# Altium PCB FanHumidityController.PcbDoc
Units mm, origin at the board's own origin, x right, y up, seen from the top; angles counter-clockwise.
Board outline 152.4 x 101.6 mm, 2 copper layers (Top Layer, Bottom Layer); 50 components, 34 nets, 157 pads, 0 vias.
Unrouted connection lines stored in the file: 90.
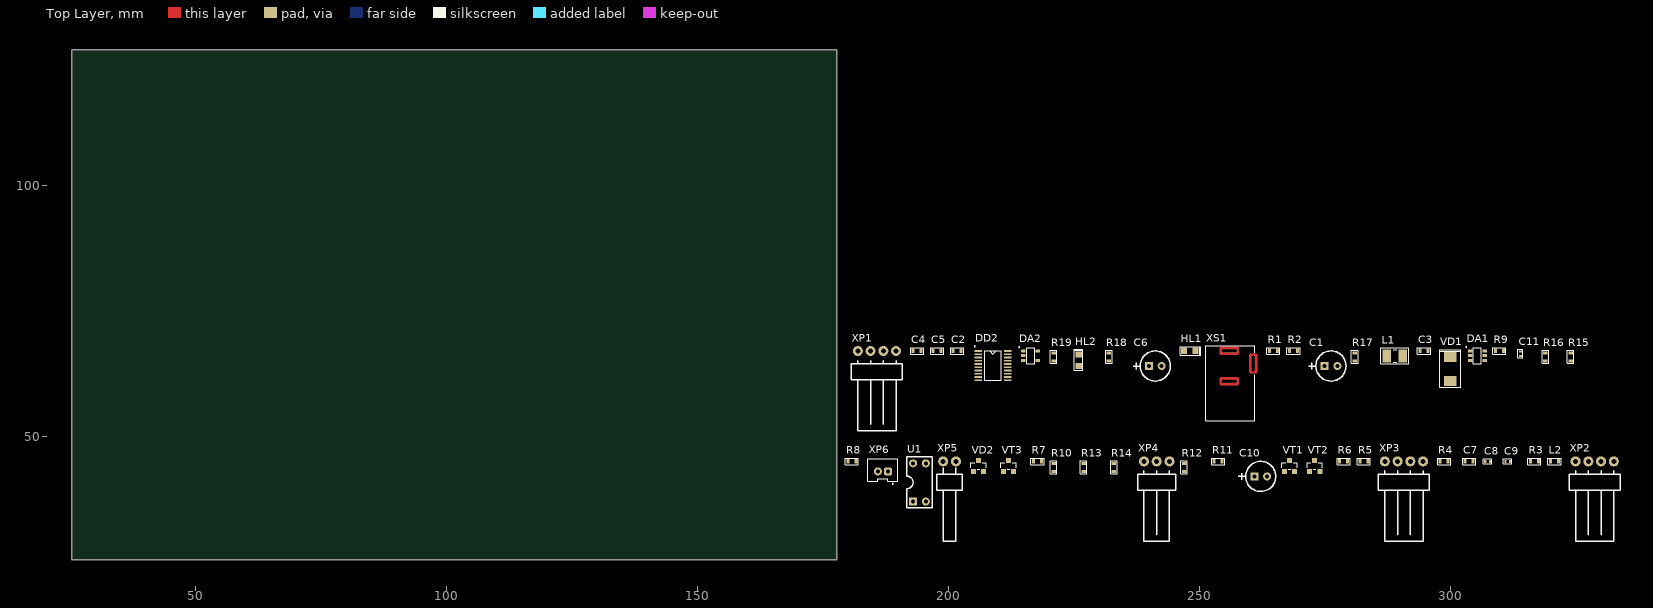
[diagram p0: Top Layer view]
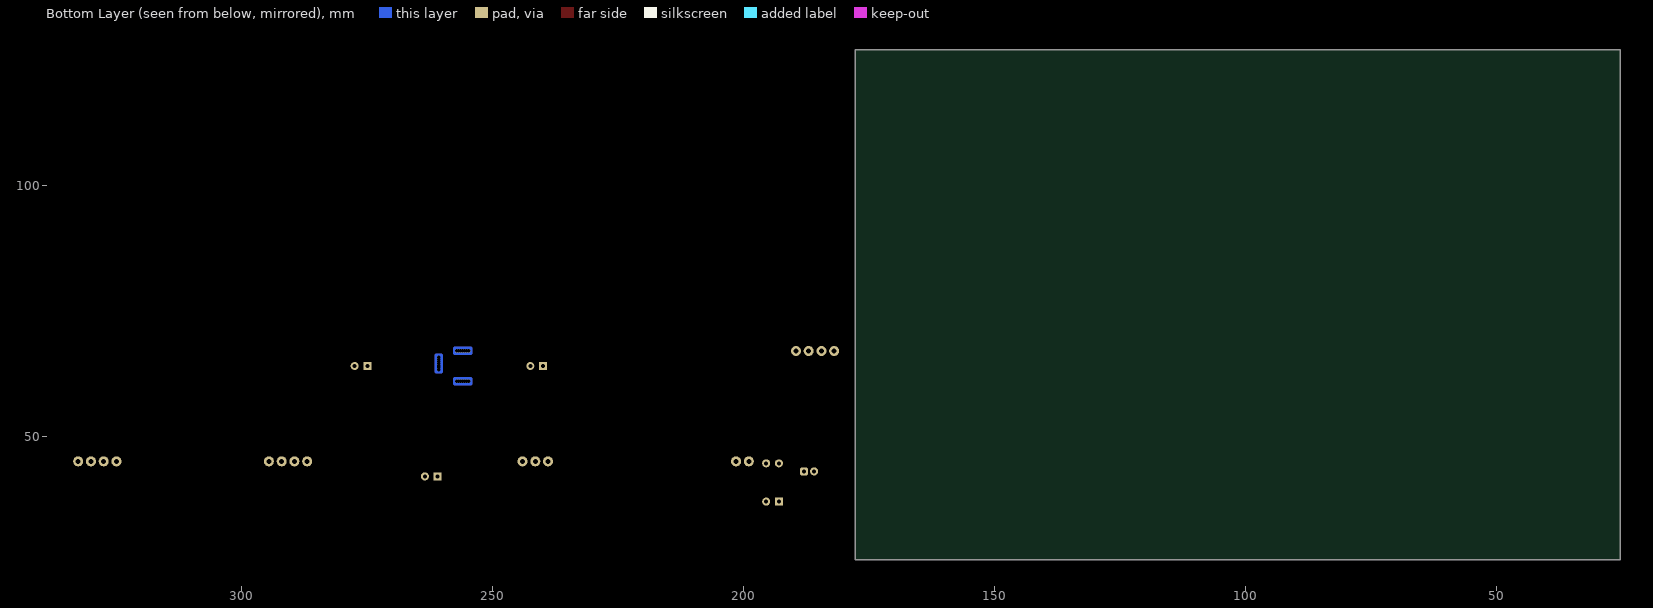
[diagram p1: Bottom Layer view, seen from below]

## Layer stack, top to bottom
Top Solder: solder mask 0.0102, Solder Resist, Dk 3.5
Top Layer: signal copper 0.0356
Dielectric 1: dielectric 0.32, FR-4, Dk 4.8
Bottom Layer: signal copper 0.0356
Bottom Solder: solder mask 0.0102, Solder Resist, Dk 3.5

## Board outline
25.4,25.4 177.8,25.4 177.8,127 25.4,127

## Design rules (kind name [scope] priority, off if disabled: settings)
Clearance [All] p1: gap=0.254 ignorepadtopadclearanceinfootprint=FALSE except(0: Arc-Hole Track-Hole SMDPad-Hole THPad-Hole Via-Hole Fill-Hole Poly-Hole Region-Hole Text-Hole)
PolygonConnect [All] p1: connectstyle=Relief reliefconductorwidth=0.254 reliefentries=4 polygonreliefangle="90 Angle" airgapwidth=0.254
RoutingVias [All] p1: holewidth=0.711 width=1.27 viastyle="Through Hole" minholewidth=0.711 minwidth=1.27 maxholewidth=0.711 maxwidth=1.27
SolderMaskExpansion [All] p1: expansion=0.102 istentingtop=FALSE
Width [All] p1: maxlimit=0.254 minlimit=0.254 preferedwidth=0.254
30 further rules are at their usual default settings.

## Components (designator, comment, footprint, x,y, rotation, side; value= is the part's Value field where it differs from the comment)
C1 "22uF 16V" CAP100RP 275,64 r0 top
C2 "2µ2x10V X7R" 0603_CAP 201,67 r0 top
C3 "10nF 50V X7R" 0603_CAP 294,67 r0 top
C4 "10nF 50V X7R" 0603_CAP 193,67 r0 top
C5 "2µ2x10V X7R" 0603_CAP 197,67 r0 top
C6 "22uF 16V" CAP100RP 240,64 r0 top
C7 "2µ2x10V X7R" 0603_CAP 303,45 r0 top
C8 "µ10x10V X7R" 0402_CAP 307,45 r0 top
C9 "µ10x10V X7R" 0402_CAP 311,45 r0 top
C10 "22uF 16V" CAP100RP 261,42 r0 top
C11 "µ10x10V X7R" 0402_CAP 314,66 r90 top
DA1 "MP2259DT(J)" SOT23-6 304,67 r0 top
DA2 "TPS79333DBVR" SOT23-5 215,67 r0 top
DD2 "STM32F030F4P6" TSSOP20 206,67 r0 top
HL1 "KP-2012SYC" KP-2012_YEL 247,67 r0 top
HL2 "KP-2012SYC" KP-2012_YEL 226,64 r90 top
L1 "NLCV32T" 1210L 289,66 r0 top value="10 µH"
L2 "470R BLM18PG471SN1D" 0603_BLM18 320,45 r0 top
R1 "10k 1%" 0603_RES 264,67 r0 top
R2 "51k 1%" 0603_RES 268,67 r0 top
R3 "10k 1%" 0603_RES 316,45 r0 top
R4 "3k3 1%" 0603_RES 298,45 r0 top
R5 "3k3 1%" 0603_RES 282,45 r0 top
R6 "3k3 1%" 0603_RES 278,45 r0 top
R7 "3k3 1%" 0603_RES 217,45 r0 top
R8 "240R 1%" 0603_RES 180,45 r0 top
R9 "10k 1%" 0603_RES 309,67 r0 top
R10 "3k3 1%" 0603_RES 221,43 r90 top
R11 "10k 1%" 0603_RES 253,45 r0 top
R12 "3k3 1%" 0603_RES 247,43 r90 top
R13 "3k3 1%" 0603_RES 227,43 r90 top
R14 "3k3 1%" 0603_RES 233,43 r90 top
R15 "3k3 1%" 0603_RES 324,65 r90 top
R16 "3k3 1%" 0603_RES 319,65 r90 top
R17 "10k 1%" 0603_RES 281,65 r90 top
R18 "1k2 1%" 0603_RES 232,65 r90 top
R19 "1k2 1%" 0603_RES 221,65 r90 top
U1 "PC817" DIP4 193,37 r90 top
VD1 "SM6T18A" SMB-STPS3L60U 300,61 r90 top
VD2 "BAT54" SOT-23-(2) 205,43 r0 top
VT1 "BSS138" "SOT-23 MOSFET" 267,43 r0 top
VT2 "IRLML2244TRPBF" "SOT-23 MOSFET" 272,43 r0 top
VT3 "BSS138" "SOT-23 MOSFET" 211,43 r0 top
XP1 "WF-4R" WF-4R 182,67 r0 top
XP2 "WF-4R" WF-4R 325,45 r0 top
XP3 "WF-4R" WF-4R 287,45 r0 top
XP4 "WF-3R" WF-3R 239,45 r0 top
XP5 "WF-2R" WF-2R 199,45 r0 top
XP6 "PH-2" PH-2 188,43 r0 top
XS1 "DS-210B(PBT)(NB)" DS-210B(PBT)(NB) 256,67 r90 top

## Footprints (in the part's own frame and the unit in brackets; to place one, negate y for a bottom-side part, rotate by r counter-clockwise, add the part's x,y. Pads: shape width x height; smd on the part's side, far side on the other; paste and mask are expansions set on the pad)
0402_CAP [mm] "Конденсатор 0402(1005)"
  rect 0.4x0.6 smd mask+0.025: 1(0,0) 2(0.9,0)
  silkscreen extent -0.4,-0.5 1.3,0.5, body extent -0.05,-0.25 0.95,0.25, height 0.5
0603_BLM18 [mm] "Ферритовый фильтр 0603(1608)"
  rect 0.6x0.9 smd mask+0.025: 1(0,0) 2(1.6,0)
  silkscreen extent -0.5,-0.65 2.1,0.65, body extent 0,-0.4 1.6,0.4, height 0.8
0603_CAP [mm] "Конденсатор 0603(1608)"
  rect 0.6x0.9 smd mask+0.025: 1(0,0) 2(1.6,0)
  silkscreen extent -0.5,-0.65 2.1,0.65, body extent -0.05,-0.45 1.65,0.45, height 0.95
0603_RES [mm] "Резистор 0603(1608)"
  rect 0.6x0.9 smd mask+0.025: 1(0,0) 2(1.6,0)
  silkscreen extent -0.5,-0.65 2.1,0.65, body extent -0.05,-0.4 1.65,0.4, height 0.56
1210L [mm] "Inductor, 2-Leads, Body 3,20x2,50mm, IPC Low Density"
  rect 1.7x2.65 smd: 1(-1.6,0) 2(1.6,0)
  silkscreen extent -2.8,-1.6 2.8,1.6, body extent -1.6,-1.25 1.6,1.25, height 2.3
CAP100RP [mm]
  round 1.6 hole 0.8: MINUS(2.54,0)
  rect 1.6x1.6 hole 0.8: PLUS(0,0)
  silkscreen extent -3.17,-3 4.27,3
DIP4 [mm]
  rect 1.6x1.6 hole 0.8: 1(0,0)
  round 1.6 hole 0.8: 2(0,-2.54) 3(7.62,-2.54) 4(7.62,0)
  silkscreen extent -1.27,-3.81 8.89,1.27
DS-210B(PBT)(NB) [mm] "DS-210, Гнездо питания 2,1х5,5мм на панель"
  round 0.7 hole 0.7: 1(0,1.2) 1(0,0.8) 1(0,0.4) 1(0,0) 1(0,-0.4) 1(0,-0.8) 1(0,-1.2)
  round 0.6 hole 0.7: 2(-6,-1.2) 2(-6,-0.8) 2(-6,-0.4) 2(-6,0) 2(-6,0.4) 2(-6,0.8) 2(-6,1.2) 3(-3.7,-4.8) 3(-3.3,-4.8) 3(-2.9,-4.8) 3(-2.5,-4.8) 3(-2.1,-4.8) 3(-1.7,-4.8) 3(-1.3,-4.8)
  Top Layer region: -4.2,-4 -4.4,-4.2 -4.4,-5.4 -4.2,-5.6 -0.8,-5.6 -0.6,-5.4 -0.6,-4.2 -0.8,-4
  Top Layer region: -6.8,-1.7 -6.6,-1.9 -5.4,-1.9 -5.2,-1.7 -5.2,1.7 -5.4,1.9 -6.6,1.9 -6.8,1.7
  Top Layer region: -0.8,-1.7 -0.6,-1.9 0.6,-1.9 0.8,-1.7 0.8,1.7 0.6,1.9 -0.6,1.9 -0.8,1.7
  Bottom Layer region: -4.2,-4 -4.4,-4.2 -4.4,-5.4 -4.2,-5.6 -0.8,-5.6 -0.6,-5.4 -0.6,-4.2 -0.8,-4
  Bottom Layer region: -6.8,-1.7 -6.6,-1.9 -5.4,-1.9 -5.2,-1.7 -5.2,1.7 -5.4,1.9 -6.6,1.9 -6.8,1.7
  Bottom Layer region: -0.8,-1.7 -0.6,-1.9 0.6,-1.9 0.8,-1.7 0.8,1.7 0.6,1.9 -0.6,1.9 -0.8,1.7
  silkscreen extent -13.9,-5.1 1,4.7, body extent -13.8,-4.97 0.7,4.57, height 11
KP-2012_YEL [mm] "Светодиод 0805 Жёлтый"
  rect 1.2x1.3 smd mask+0.025: 1(0,0) 2(2.275,0)
  silkscreen extent -0.8,-0.85 3.3,0.85, body extent 0.15,-0.62 2.15,0.62, height 1.1
PH-2 [mm]
  rrect50% 1.6x1.6 hole 0.8 mask+0.025: 1(0,0)
  round 1.6 hole 0.8 mask+0.025: 2(-2,0)
  silkscreen extent -4,-2.6 2,2.5, body extent -3.95,-1.7 1.95,2.8, height 6
SMB-STPS3L60U [mm]
  rect 2x2.5 smd mask+0.025: 1(0,0) 2(4.763,0)
  silkscreen extent -1.2,-2.1 6.25,2.1, body extent -0.39,-1.97 5.19,1.97, height 2.6
SOT23-5 [mm]
  rrect50% 0.9x0.6 smd mask+0.025: 1(0,0)
  rect 0.9x0.6 smd mask+0.025: 2(0,-0.953) 3(0,-1.905) 4(2.857,-1.905) 5(2.857,0)
  silkscreen extent -0.95,-2.54 2.22,0.87, body extent 0,-2.4 2.8,0.5, height 1.09
SOT23-6 [mm]
  rrect50% 0.9x0.6 smd mask+0.025: 1(0,0)
  rect 0.9x0.6 smd mask+0.025: 2(0,-0.953) 3(0,-1.905) 4(2.857,-1.905) 5(2.857,-0.953) 6(2.857,0)
  silkscreen extent -0.87,-2.54 2.22,0.87, body extent 0.02,-2.45 2.83,0.55, height 0.86
"SOT-23 MOSFET" [mm]
  rect 1x1 smd mask+0.025: D(1.016,2.21) G(0,0) S(2.032,0)
  silkscreen extent -0.51,0.46 2.54,1.73, body extent -0.48,-0.22 2.52,2.42, height 1.08
SOT-23-(2) [mm]
  rect 1x1 smd mask+0.025: 1(0,0) 2(2.032,0) 3(1.016,2.21)
  silkscreen extent -0.51,0.46 2.54,1.73, body extent -0.48,-0.22 2.53,2.42, height 1.08
TSSOP20 [mm]
  rect 1.5x0.35 smd mask+0.025: 1(0,0) 2(0,-0.65) 3(0,-1.3) 4(0,-1.95) 5(0,-2.6) 6(0,-3.25) 7(0,-3.9) 8(0,-4.55) 9(0,-5.2) 10(0,-5.85) 11(5.85,-5.85) 12(5.85,-5.2) 13(5.85,-4.55) 14(5.85,-3.9) 15(5.85,-3.25) 16(5.85,-2.6) 17(5.85,-1.95) 18(5.85,-1.3) 19(5.85,-0.65) 20(5.85,0)
  silkscreen extent -0.8,-5.85 4.55,1, body extent -0.35,-6.23 6.2,0.37, height 1.2
WF-2R [mm]
  round 2 hole 1: 1(0,0) 2(2.54,0)
  silkscreen extent -1.27,-15.88 3.81,-1.27
WF-3R [mm]
  round 2 hole 1: 1(0,0) 2(2.54,0) 3(5.08,0)
  silkscreen extent -1.27,-15.88 6.35,-1.91
WF-4R [mm]
  round 2 hole 1: 1(0,0) 2(2.54,0) 3(5.08,0) 4(7.62,0)
  silkscreen extent -1.27,-15.88 8.89,-1.91

## Part data
C1 C6 C10: library part K50-35-S
C2 C5 C7: library part C0603, "C0603"
C3 C4: library part C0603, "C0603", Part Number=GRM1885C1H222JA01J
C8 C9 C11: library part C0402, "C0402", PN=CC0402KRX7R8BB104
DA1: library part MP2359DT(J)
HL1 HL2: library part KP-2012_YEL, Part Number=KP-2012SYC
L1: "NLCV32T-100K-EF, 10 мкГн, 1210, 10%, Индуктивность SMD", PN=NLCV32T-100K-EF
L2: library part BLM18PG, "BLM18PG"
R1 R3 R9 R11 R17: library part R0603, "RC0603FR-0710KL", Part Number=RC0603FR-0710KL
R2: library part R0603, "RC0603FR-0751KL", Part Number=RC0603FR-0751KL
R4 R5 R6 R7 R10 R12 R13 R14 R15 R16: library part R0603, "R0603", Part Number=RC0603FR-073K3L
R8: library part R0603
R18 R19: library part R0603, "R0603", Part Number=RC0603FR-071K2L
VD1: library part SM6T27A, "Защитный диод, однонаправленный, 18В, 600Вт [SMB]"
VT1 VT3: library part MMBF170
XS1: "Гнездо питания 2,1х5,5мм на панель", Part Number=DS-210B(PBT)(NB)

## Nets (pads, with @x,y where several pads share a name; then routed paths per layer and width w, separated by ;. In a path a pad name is that pad's centre, name@x,y a point inside that pad or via, vN(x,y) a via of type N, cw(c..) or ccw(c..) an arc to the next point about the centre after c; other vN are vias at no path point)
+3V3: C5.2 DA2.5 L2.1 R7.1 R10.1 R14.1
+3V3_MCU: C7.2 C8.1 C9.1 C11.1 DD2.5 DD2.16 L2.2 R9.1 R15.2 R16.2 XP1.1
+5V: C2.2 C6.PLUS DA2.1 DA2.3 L1.2 R2.1 R5.2 R13.1 XP2.1
+12V: C1.PLUS DA1.4 DA1.5 R3.2 R11.2 VD1.2 XP3.2 XS1.1
ADC_5V: DD2.7 R5.1 R6.1
ADC_12V: DD2.6 R3.1 R4.1
DATA_OUT: DD2.12 R8.2
FAN_FAIL: DD2.3 R18.1
FAN_PWM: DD2.13 R17.1
GND: C2.1 C4.2 C5.1 C7.1 C8.2 C9.2 DA2.2 DD2.1 DD2.15 R4.2 R6.2 R17.2 U1.2 XP2.3 XP3.1 XP4.1 XP5.1
I2C_SCL: DD2.17 R16.1
I2C_SDA: DD2.18 R15.1
NetC1_MINUS: C1.MINUS C6.MINUS C10.MINUS C11.2 DA1.2 HL1.2 HL2.2 R1.2 VD1.1 XP1.3 XS1.2 XS1.3
NetC3_1: C3.1 DA1.1
NetC3_2: C3.2 DA1.6 L1.1
NetC4_1: C4.1 DA2.4
NetDA1_3: DA1.3 R1.1 R2.2
NetDD1_2: R9.2
NetHL1_1: HL1.1 R18.2
NetHL2_1: HL2.1 R19.2
NetR8_1: R8.1 U1.1
NetR11_1: R11.1 R12.1
NetR12_2: R12.2
NetR13_2: R13.2 R14.2 XP3.4
NetU1_3: U1.3 XP6.2
NetU1_4: U1.4 XP6.1
PWM: C10.PLUS XP4.2 XP5.2
SENS_FAIL: DD2.2 R19.1
SWCLK: DD2.20 XP1.2
SWDIO: DD2.19 XP1.4
TACHO: R7.2 XP3.3 XP4.3
TACHO_MCU: DD2.14 R10.2
USART1_RX: DD2.9 XP2.4
USART1_TX: DD2.8 XP2.2
pads on no net: DD2.4 DD2.10 DD2.11 VD2.1 VD2.2 VD2.3 VT1.D VT1.G VT1.S VT2.D VT2.G VT2.S VT3.D VT3.G VT3.S